# Altium PCB BLDC Motor Controller.PcbDoc
Units mm, origin at the board's own origin, x right, y up, seen from the top; angles counter-clockwise.
Board outline 100 x 80 mm, 4 copper layers (L1 - Primary, L2 - GND, L3 - GND, L4 - Secondary), stack 1.57 mm thick; 78 components, 40 nets, 216 pads, 255 vias.
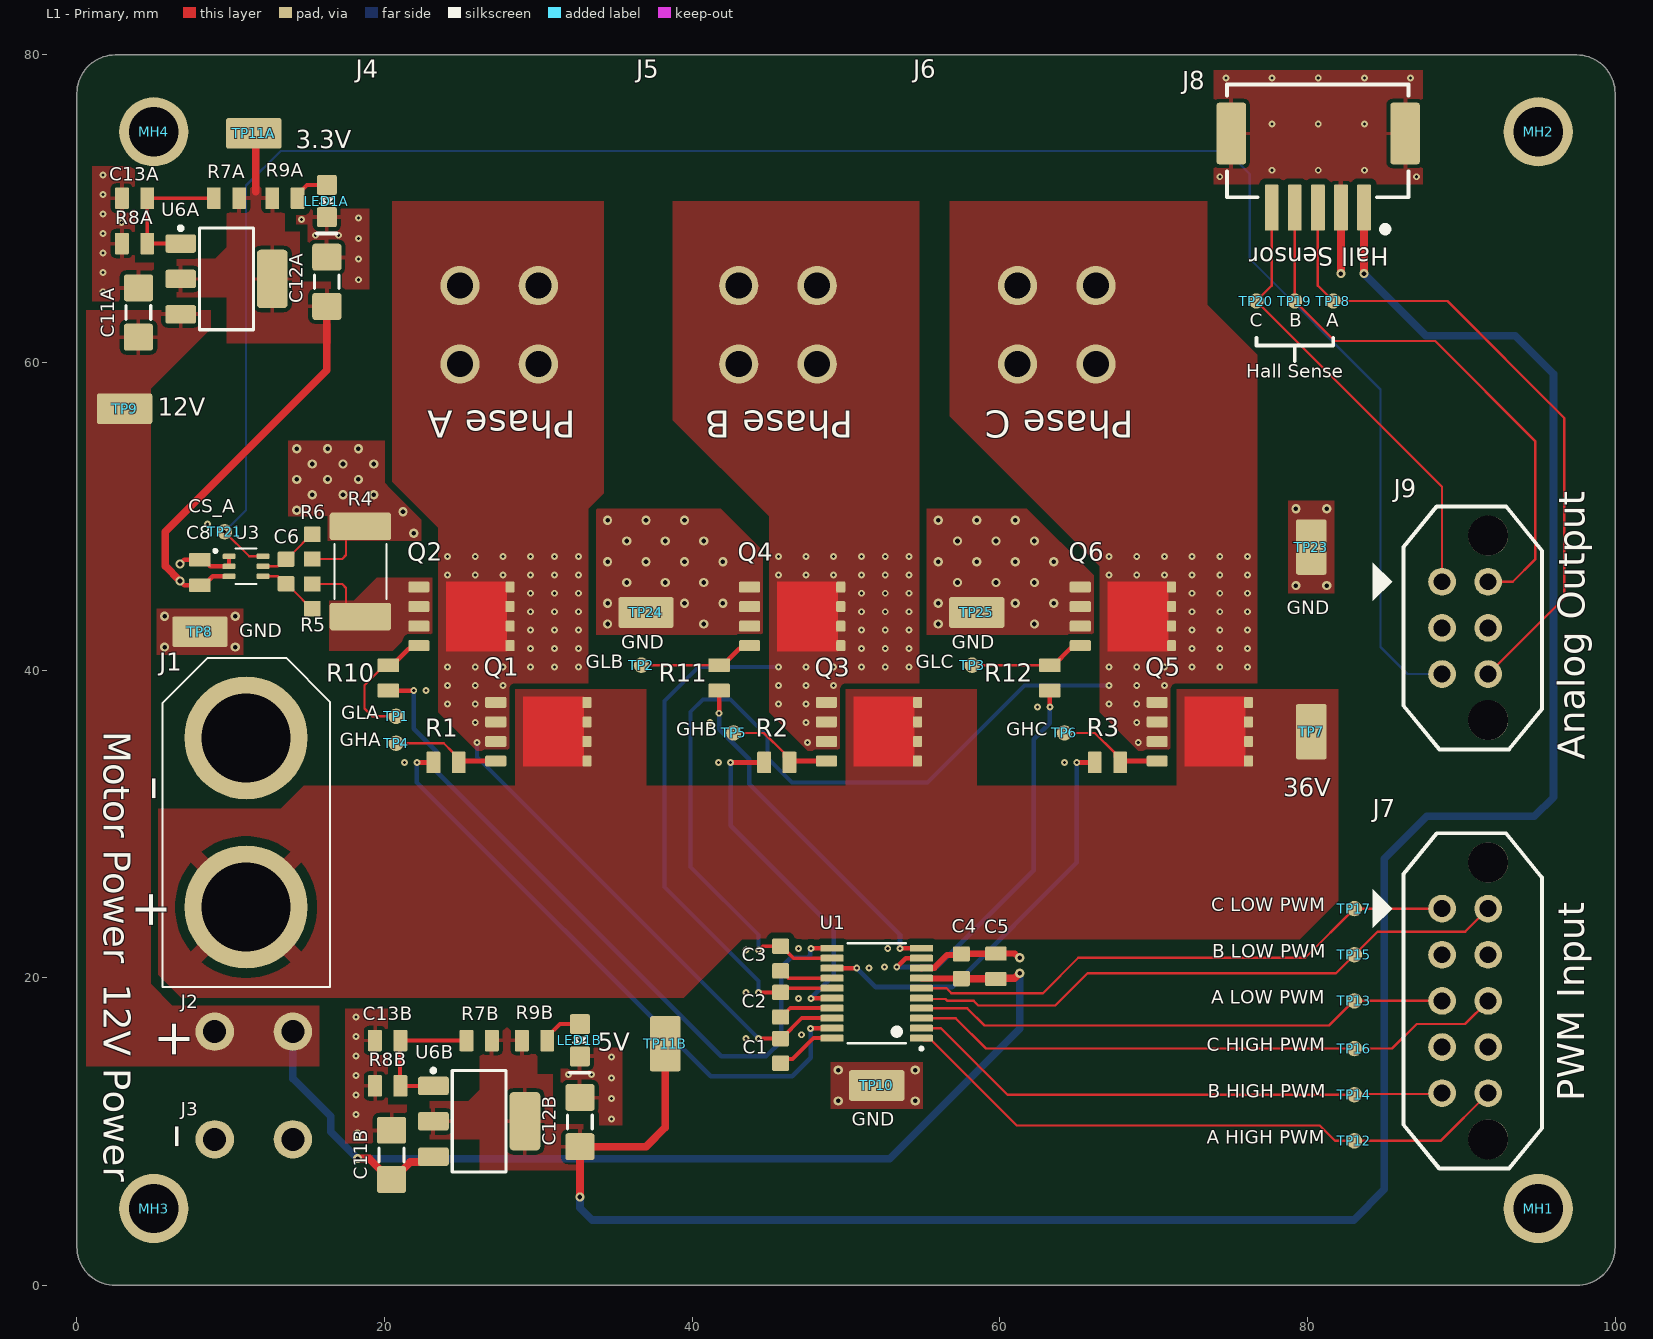
[diagram p0: L1 - Primary view]
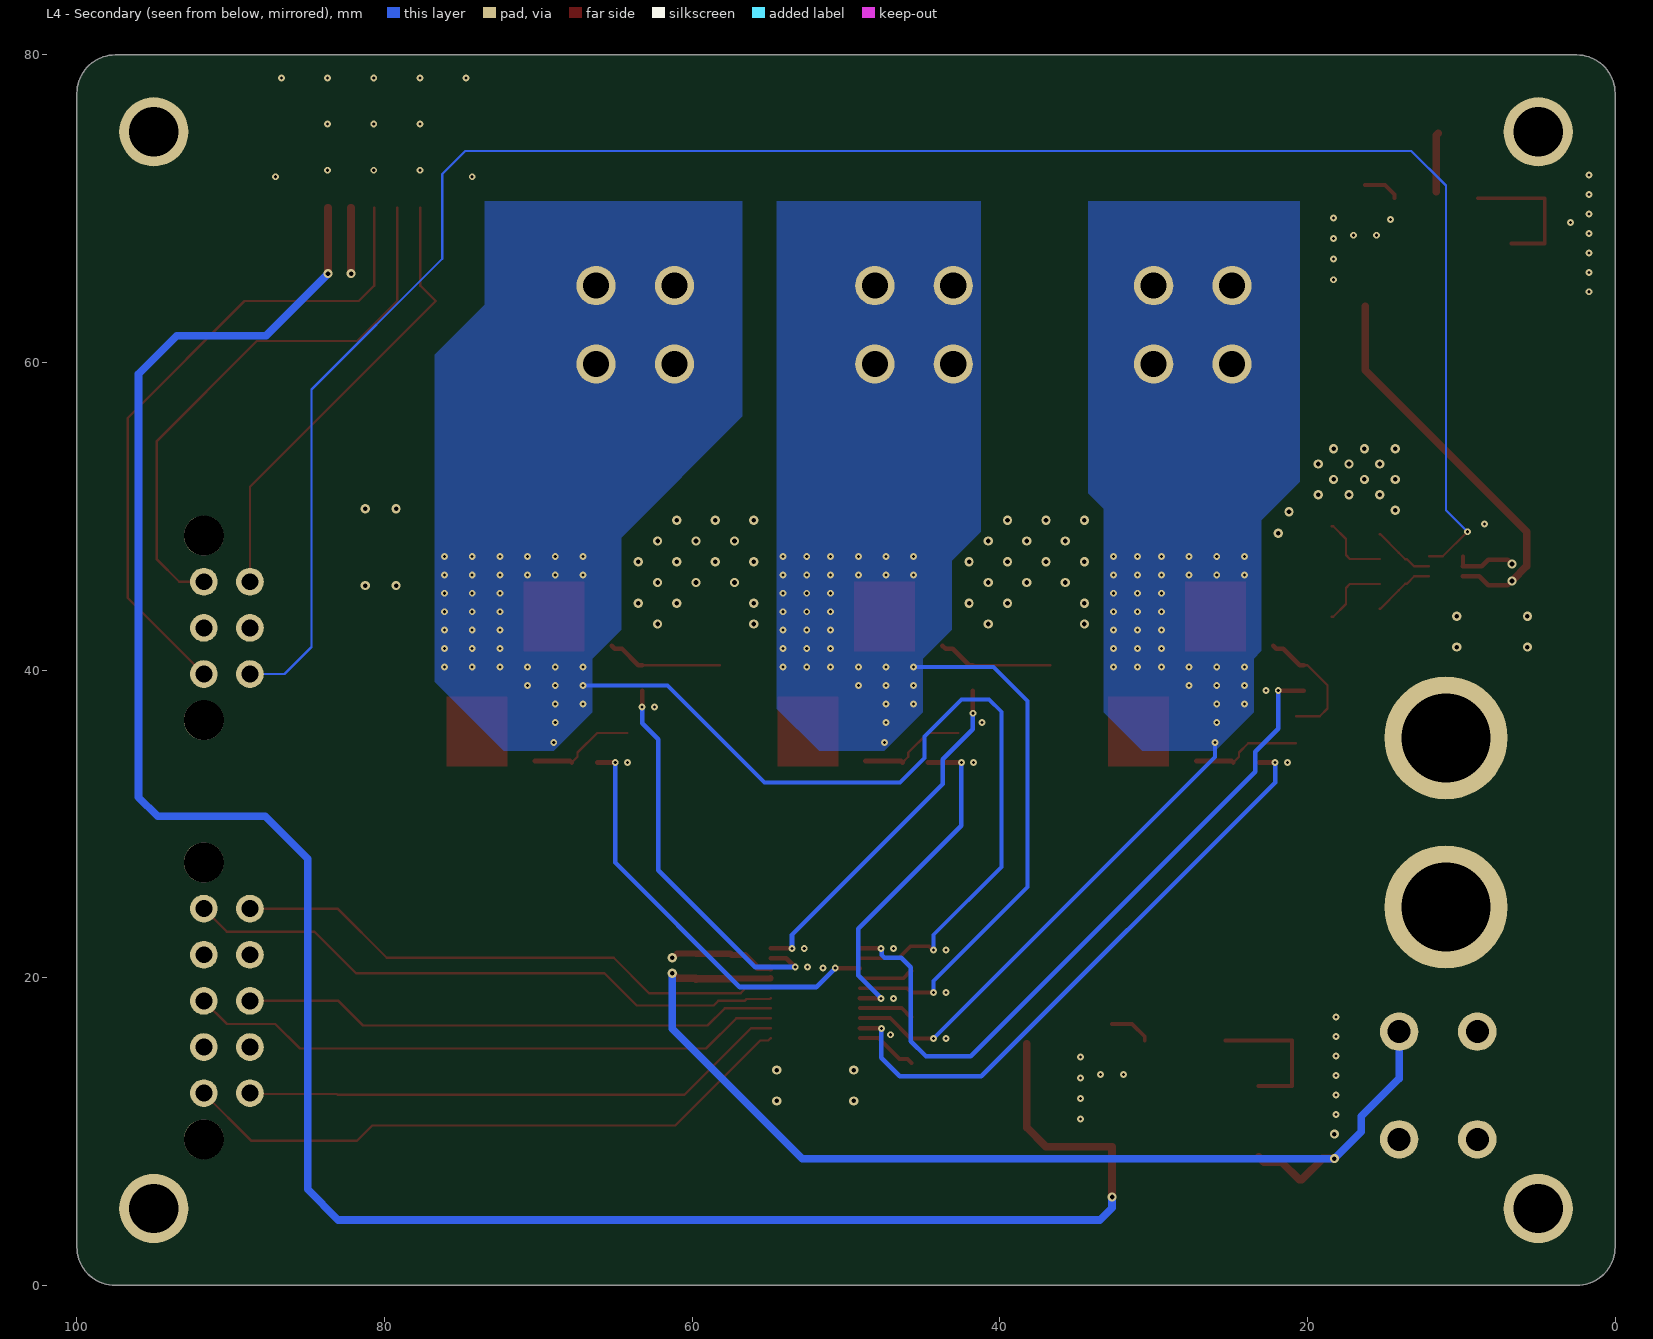
[diagram p1: L4 - Secondary view, seen from below]
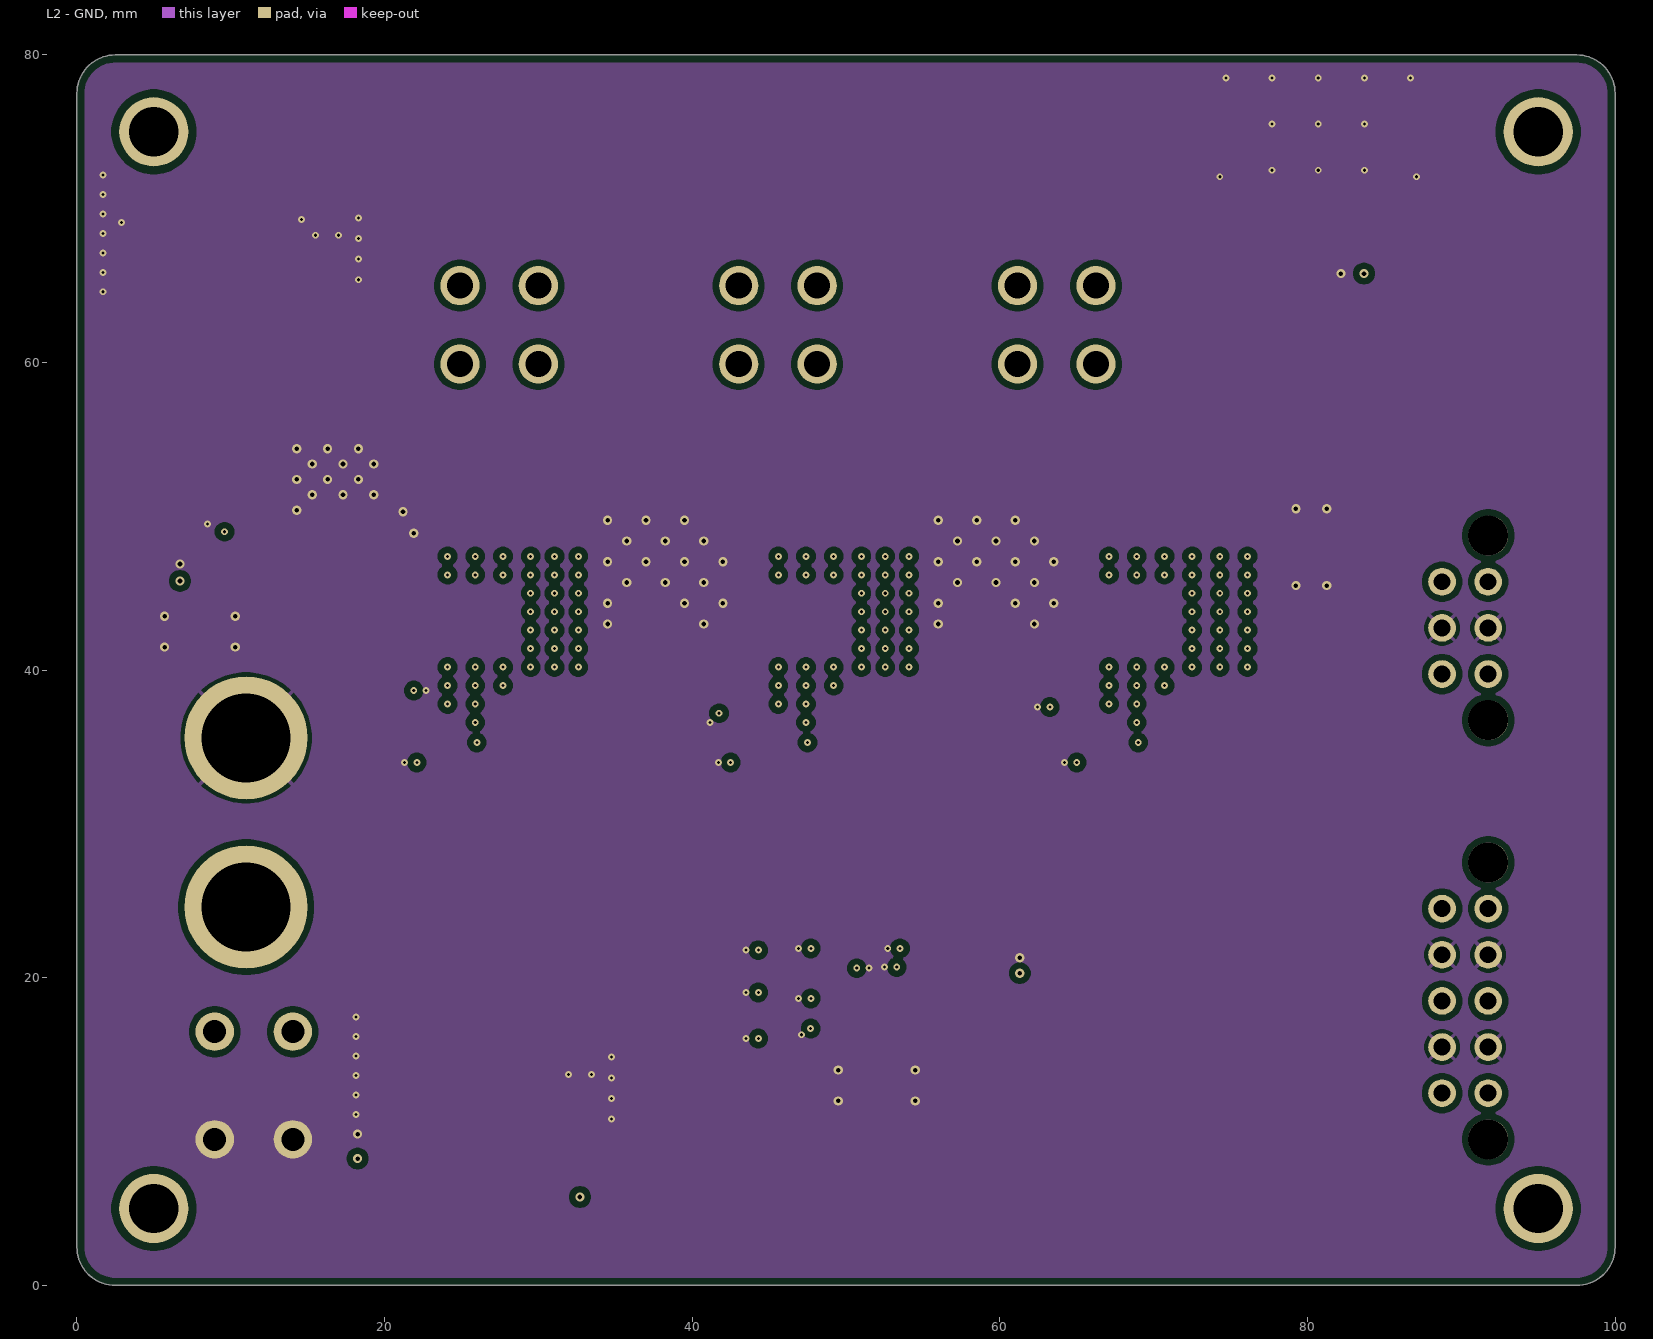
[diagram p2: L2 - GND]
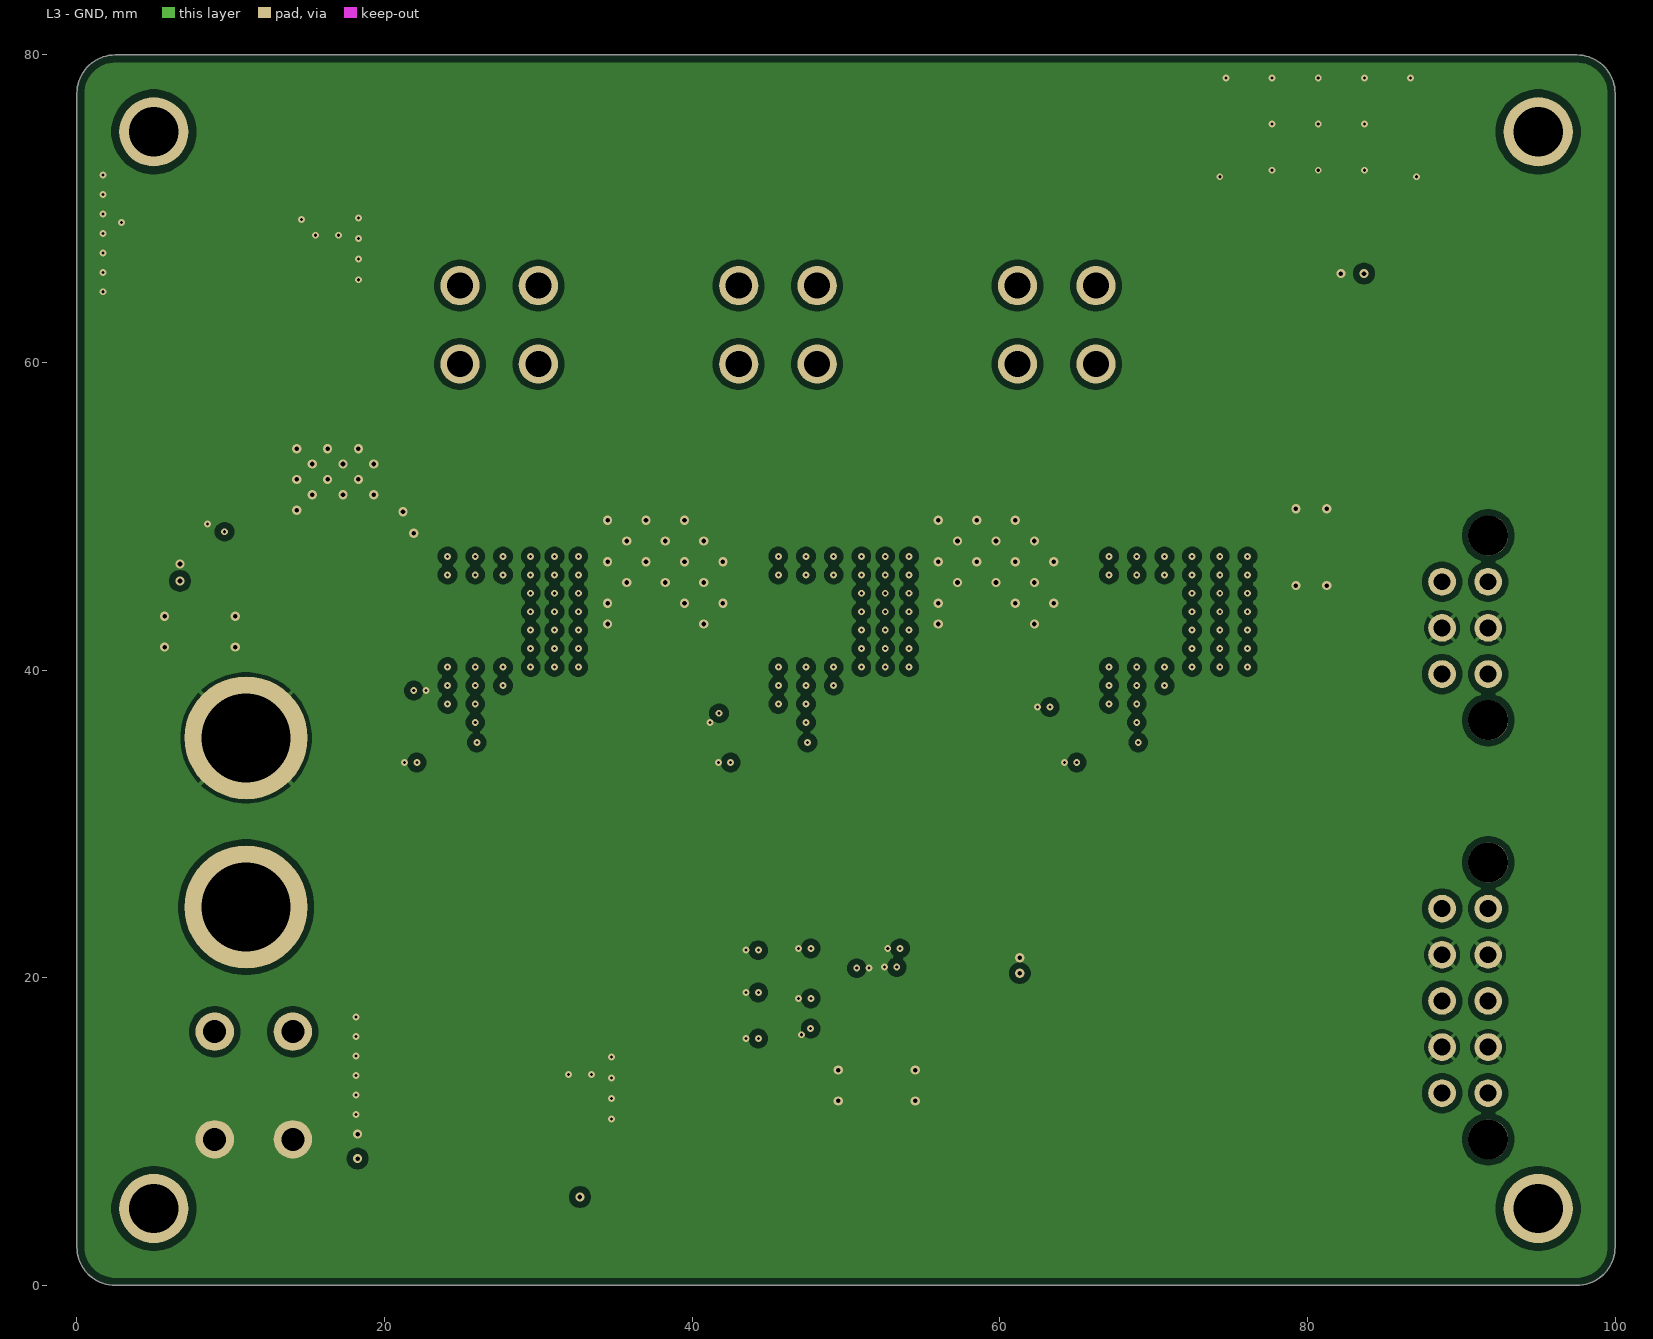
[diagram p3: L3 - GND]
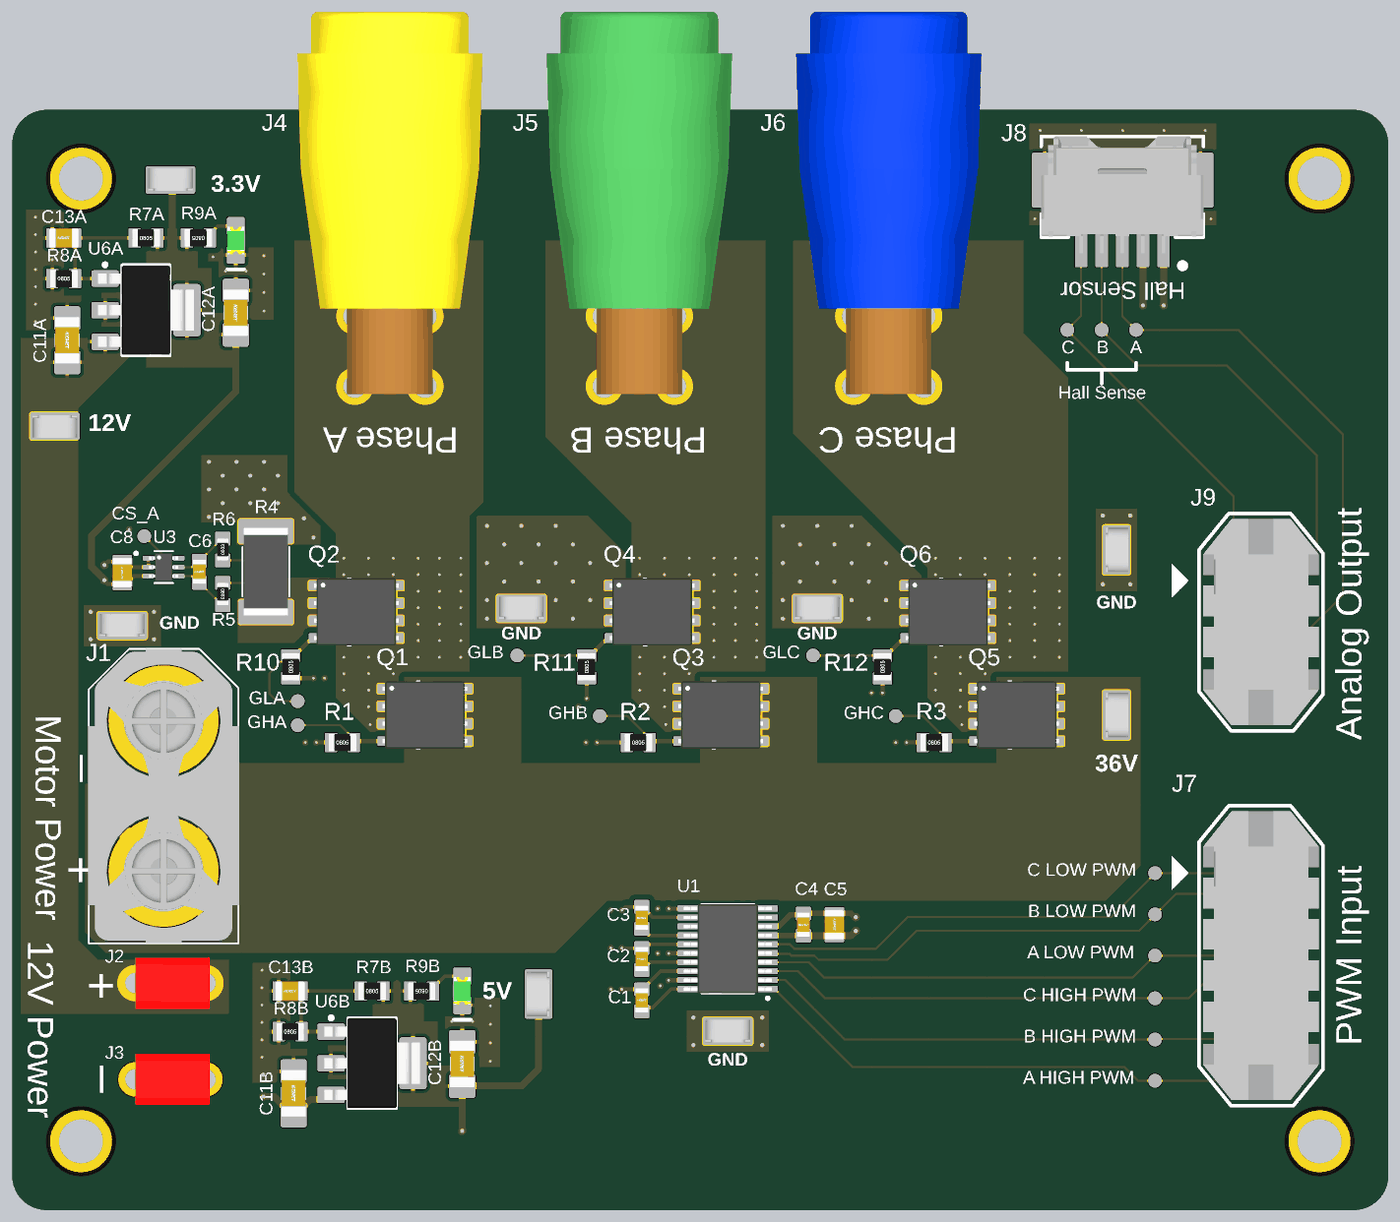
[diagram p4: 3D render of the assembled board from above, using the file's embedded part models]

## Layer stack, top to bottom
Top Solder: solder mask 0.0127, Solder Resist, Dk 3.8
L1 - Primary: signal copper 0.035
Dielectric 1: prepreg 0.2, 7628, Dk 4.6
L2 - GND: signal copper 0.0175
Core: core 1.065, FR-4, Dk 4.5
L3 - GND: signal copper 0.0175
Dielectric 2: prepreg 0.2, 7628, Dk 4.6
L4 - Secondary: signal copper 0.035
Bottom Solder: solder mask 0.0127, Solder Resist, Dk 3.8

## Board outline
0,2.5 ccw(c2.5,2.5) 2.5,0 97.5,0 ccw(c97.5,2.5) 100,2.5 100,77.5 ccw(c97.5,77.5) 97.5,80 2.5,80 ccw(c2.5,77.5) 0,77.5

## Design rules (kind name [scope] priority, off if disabled: settings)
BoardOutlineClearance [All] p1: gap=1 ignorepadtopadclearanceinfootprint=FALSE except(0.5: Fill-OutlineEdge Fill-CavityEdge Fill-CutoutEdge Fill-SplitBarrior Fill-SplitContinuation Poly-OutlineEdge Poly-CavityEdge Poly-CutoutEdge Poly-SplitBarrior Poly-SplitContinuation Region-OutlineEdge Region-CavityEdge Region-CutoutEdge Region-SplitBarrior Region-SplitContinuation Text-OutlineEdge Text-CavityEdge Text-CutoutEdge Text-SplitBarrior Text-SplitContinuation)
Clearance Clearance_MH [HasFootprint('MOUNTING_HOLE_3mm')] p1: gap=0.5 ignorepadtopadclearanceinfootprint=FALSE
Clearance [All] p2: gap=0.4 ignorepadtopadclearanceinfootprint=FALSE except(0.102: Arc-Arc Arc-Track Arc-SMDPad Arc-THPad Arc-Text Track-Track Track-SMDPad Track-THPad Track-Text SMDPad-SMDPad SMDPad-THPad SMDPad-Text THPad-THPad THPad-Text Text-Text; 0.127: Arc-Via Track-Via SMDPad-Via THPad-Via Via-Via Via-Text; 0.25: Arc-Hole Track-Hole SMDPad-Hole THPad-Hole Via-Hole Fill-Hole Poly-Hole Region-Hole Text-Hole)
ComponentClearance [All] p1: gap=0.102 collisioncheckmode=3 verticalgap=0.102 showdistances=TRUE
DiffPairsRouting [All] p1: maxlimit=0.102 minlimit=0.102 mostfreqgap=0.102 toplayer_minwidth=0.102 toplayer_maxwidth=1816.048 toplayer_prefwidth=0.102 midlayer1_minwidth=0.102 midlayer1_maxwidth=1816.048 midlayer1_prefwidth=0.102 midlayer2_minwidth=0.102 midlayer2_maxwidth=1816.048 midlayer2_prefwidth=0.102 bottomlayer_minwidth=0.102 bottomlayer_maxwidth=1816.048 bottomlayer_prefwidth=0.102 maxuncoupledlength=12.7
Height [All] p1: minheight=0 maxheight=1816.048 prefheight=12.7
HoleSize [All] p1: absolutevalues=TRUE maxlimit=6.3 minlimit=0.2 maxpercent=80.000 minpercent=20.000
HoleToHoleClearance [All] p1: gap=0.25 allowstackedmicrovias=FALSE
MinimumAnnularRing [All] p1: minimumring=0.076
MinimumSolderMaskSliver [All] p1: minsoldermaskwidth=0
PlaneClearance [All] p1: clearance=0.102
PlaneConnect PlaneConnectPowerPads [InPadClass('PowerPads')] p1: planeconnectstyle=Direct reliefexpansion=0.508 reliefentries=4 reliefconductorwidth=0.254 reliefairgap=0.254
PlaneConnect [All] p2: pad.planeconnectstyle=Relief pad.reliefexpansion=0.3 pad.reliefentries=4 pad.reliefconductorwidth=0.102 pad.reliefairgap=0.102 via.planeconnectstyle=Direct via.reliefexpansion=0.3 via.reliefentries=4 via.reliefconductorwidth=0.127 via.reliefairgap=0.127
PolygonConnect PolygonConnectPowerPads [All vs (InPadClass('PowerPads'))] p1: connectstyle=Direct reliefconductorwidth=0.254 reliefentries=4 polygonreliefangle="90 Angle" airgapwidth=0.254
PolygonConnect [All] p2: thpad.connectstyle=Relief thpad.reliefconductorwidth=0.254 thpad.reliefentries=4 thpad.polygonreliefangle="45 Angle" thpad.airgapwidth=0.254 smdpad.connectstyle=Relief smdpad.reliefconductorwidth=0.254 smdpad.reliefentries=4 smdpad.polygonreliefangle="90 Angle" smdpad.airgapwidth=0.254 via.connectstyle=Direct via.reliefconductorwidth=0.127 via.reliefentries=4 via.polygonreliefangle="90 Angle" via.airgapwidth=0.127
RoutingVias [All] p1: holewidth=0.2 width=0.45 viastyle="Through Hole" minholewidth=0.2 minwidth=0.45 maxholewidth=6.3 maxwidth=6.55
SilkToSilkClearance [All] p1: silktosilkclearance=0
SilkToSolderMaskClearance [IsPad] p1: minsilkscreentomaskgap=0.102 clearancetoexposedcopper=TRUE
SolderMaskExpansion SolderMaskExpansion_Via [IsVia] p1: expansion=0.102 istentingtop=TRUE
SolderMaskExpansion [All] p2: expansion=0.075 istentingtop=FALSE
Width [All] p1: maxlimit=1816.048 minlimit=0.102 preferedwidth=0.102
20 further rules are at their usual default settings.

## Classes and differential pairs
component class "Phase A CS": C6 C8 R4 R5 R6 TP21 U3
channel class NCV1117STAT3G: "3V3 Power" "5V Power"
component class Top: J1 J2 J3 J4 J5 J6 J7 J8 J9 MH1 MH2 MH3 MH4 TP7 TP8 TP9 TP10 TP12 TP13 TP14 TP15 TP16 TP17 TP18 TP19 TP20 TP23 TP24 TP25
component class Bridge: C1 C2 C3 C4 C5 Q1 Q2 Q3 Q4 Q5 Q6 R1 R2 R3 R10 R11 R12 TP1 TP2 TP3 TP4 TP5 TP6 U1
component class "5V Power": C11B C12B C13B LED1B R7B R8B R9B TP11B U6B
component class "3V3 Power": C11A C12A C13A LED1A R7A R8A R9A TP11A U6A v

## Components (designator, comment, footprint, x,y, rotation, side; value= is the part's Value field where it differs from the comment)
C1 "CAP_0.22uF_50V_0603" CAP0603 45.75,15.25 r270 top value=0.22μF
C2 "CAP_0.22uF_50V_0603" CAP0603 45.75,18.25 r270 top value=0.22μF
C3 "CAP_0.22uF_50V_0603" CAP0603 45.75,21.25 r270 top value=0.22μF
C4 "CAP_0.1uF_50V_0603" CAP0603 57.5,20.75 r270 top value=0.1μF
C5 "CAP_2.2uF_50V_0805" CAP0805 59.75,20.75 r270 top value=2.2μF
C6 "CAP_0.1uF_50V_0603" CAP0603 13.6,46.415 r270 top value=0.1μF
C8 "CAP_0.1uF_50V_0805" CAP0805 8,46.35 r90 top value=0.1μF
C11A "CAP_10uF_50V_1206" CAP1206 4,63.25 r270 top value=10μF (schematic designator C11)
C11B "CAP_10uF_50V_1206" CAP1206 20.452,8.489 r270 top value=10μF (schematic designator C11)
C12A "CAP_10uF_50V_1206" CAP1206 16.25,65.25 r270 top value=10μF (schematic designator C12)
C12B "CAP_10uF_50V_1206" CAP1206 32.702,10.622 r270 top value=10μF (schematic designator C12)
C13A "CAP_0.022uF_50V_0805" CAP0805 3.751,70.683 r0 top value=22nF (schematic designator C13)
C13B "CAP_0.022uF_50V_0805" CAP0805 20.202,15.922 r0 top value=22nF (schematic designator C13)
J1 "CON_2POS_XT90" XT90 11,30.1 r90 top
J2 "105-1102-001" CINCH_BANANA_JACK_RED 11.5,16.5 r0 top
J3 "105-1103-001" CINCH_BANANA_JACK_RED 11.5,9.5 r0 top
J4 "CT3151SP-4" CALTEST_BANANA_JACK_YELLOW 27.45,62.45 r90 top
J5 "CT3151SP-5" CALTEST_BANANA_JACK_GREEN 45.575,62.45 r90 top
J6 "CT3151SP-6" CALTEST_BANANA_JACK_BLUE 63.7,62.45 r90 top
J7 "0447691001" MOLEX-0447691001 90.25,18.5 r270 top
J8 "CON_5M_SM_RA" MOLEX-5025850570 83.675,70.07 r0 top
J9 "0447690601" MOLEX-0447690601 90.25,42.75 r270 top
LED1A "LED_GREEN" LED_0805_GREEN 16.25,70.5 r270 top (schematic designator LED1)
LED1B "LED_GREEN" LED_0805_GREEN 32.702,15.939 r270 top (schematic designator LED1)
MH1 "MOUNTING_HOLE_M3" MOUNTING_HOLE_3mm 95,5 r0 top
MH2 "MOUNTING_HOLE_M3" MOUNTING_HOLE_3mm 95,75 r0 top
MH3 "MOUNTING_HOLE_M3" MOUNTING_HOLE_3mm 5,5 r0 top
MH4 "MOUNTING_HOLE_M3" MOUNTING_HOLE_3mm 5,75 r0 top
Q1 "CSD19502Q5B" DFN5060 30,36 r270 top
Q2 "CSD19502Q5B" DFN5060 25,43.5 r270 top
Q3 "CSD19502Q5B" DFN5060 51.5,36 r270 top
Q4 "CSD19502Q5B" DFN5060 46.5,43.5 r270 top
Q5 "CSD19502Q5B" DFN5060 73,36 r270 top
Q6 "CSD19502Q5B" DFN5060 68,43.5 r270 top
R1 "RES_10Ω_0805_1%" RES0805 24,34 r0 top value=10Ω
R2 "RES_10Ω_0805_1%" RES0805 45.5,34 r0 top value=10Ω
R3 "RES_10Ω_0805_1%" RES0805 67,34 r0 top value=10Ω
R4 "RES_1mΩ_2512_1%" RESC6532X75N 18.435,46.415 r270 top value=1mΩ
R5 "RES_100Ω_0603_1%" RES0603 15.3,44.8 r270 top value=100Ω
R6 "RES_100Ω_0603_1%" RES0603 15.3,48.03 r90 top value=100Ω
R7A "RES_845Ω_0805_1%" RES0805 9.726,70.683 r0 top value=845Ω (schematic designator R7)
R7B "RES_845Ω_0805_1%" RES0805 26.152,15.922 r0 top value=845Ω (schematic designator R7)
R8A "RES_510Ω_0805_1%" RES0805 3.751,67.733 r0 top value=510Ω (schematic designator R8)
R8B "RES_510Ω_0805_1%" RES0805 20.202,12.972 r0 top value=510Ω (schematic designator R8)
R9A "RES_787Ω_0805_1%" RES0805 13.526,70.683 r180 top value=787Ω (schematic designator R9)
R9B "RES_787Ω_0805_1%" RES0805 29.752,15.922 r180 top value=787Ω (schematic designator R9)
R10 "RES_10Ω_0805_1%" RES0805 20.25,39.5 r90 top value=10Ω
R11 "RES_10Ω_0805_1%" RES0805 41.75,39.5 r90 top value=10Ω
R12 "RES_10Ω_0805_1%" RES0805 63.25,39.5 r90 top value=10Ω
TP1 "TESTPOINT_1MM_CIRCLE" TESTPOINT_CIRCLE_1MM 20.75,37 r90 top
TP2 "TESTPOINT_1MM_CIRCLE" TESTPOINT_CIRCLE_1MM 36.7,40.325 r90 top
TP3 "TESTPOINT_1MM_CIRCLE" TESTPOINT_CIRCLE_1MM 58.2,40.325 r90 top
TP4 "TESTPOINT_1MM_CIRCLE" TESTPOINT_CIRCLE_1MM 20.75,35.25 r90 top
TP5 "TESTPOINT_1MM_CIRCLE" TESTPOINT_CIRCLE_1MM 42.7,35.922 r90 top
TP6 "TESTPOINT_1MM_CIRCLE" TESTPOINT_CIRCLE_1MM 64.2,35.922 r90 top
TP7 "TESTPOINT_SMD_LOOP" S1751-46R 80.25,36 r90 top
TP8 "TESTPOINT_SMD_LOOP" S1751-46R 8,42.5 r180 top
TP9 "TESTPOINT_SMD_LOOP" S1751-46R 3.1,57 r0 top
TP10 "TESTPOINT_SMD_LOOP" S1751-46R 52,13 r180 top
TP11A "TESTPOINT_SMD_LOOP" S1751-46R 11.5,74.9 r180 top (schematic designator TP11)
TP11B "TESTPOINT_SMD_LOOP" S1751-46R 38.25,15.709 r270 top (schematic designator TP11)
TP12 "TESTPOINT_1MM_CIRCLE" TESTPOINT_CIRCLE_1MM 83.05,9.4 r90 top
TP13 "TESTPOINT_1MM_CIRCLE" TESTPOINT_CIRCLE_1MM 83.05,18.5 r90 top
TP14 "TESTPOINT_1MM_CIRCLE" TESTPOINT_CIRCLE_1MM 83.05,12.4 r90 top
TP15 "TESTPOINT_1MM_CIRCLE" TESTPOINT_CIRCLE_1MM 83.05,21.5 r90 top
TP16 "TESTPOINT_1MM_CIRCLE" TESTPOINT_CIRCLE_1MM 83.05,15.4 r90 top
TP17 "TESTPOINT_1MM_CIRCLE" TESTPOINT_CIRCLE_1MM 83.05,24.5 r90 top
TP18 "TESTPOINT_1MM_CIRCLE" TESTPOINT_CIRCLE_1MM 81.675,64 r90 top
TP19 "TESTPOINT_1MM_CIRCLE" TESTPOINT_CIRCLE_1MM 79.175,64 r90 top
TP20 "TESTPOINT_1MM_CIRCLE" TESTPOINT_CIRCLE_1MM 76.675,64 r90 top
TP21 "TESTPOINT_1MM_CIRCLE" TESTPOINT_CIRCLE_1MM 9.6,49 r0 top
TP23 "TESTPOINT_SMD_LOOP" S1751-46R 80.25,48 r90 top
TP24 "TESTPOINT_SMD_LOOP" S1751-46R 37,43.75 r180 top
TP25 "TESTPOINT_SMD_LOOP" S1751-46R 58.5,43.75 r180 top
U1 "DRV8300NIPWR" 20-TSSOP_4400X6500X1200 52,19 r180 top
U3 "INA190A2IDCKR" TI_SC-70-6 11,46.75 r0 top
U6A "LDO_ADJ_1A" SOT223 9.726,65.433 r0 top (schematic designator U6)
U6B "LDO_ADJ_1A" SOT223 26.152,10.672 r0 top (schematic designator U6)

## Footprints (in the part's own frame and the unit in brackets; to place one, negate y for a bottom-side part, rotate by r counter-clockwise, add the part's x,y. Pads: shape width x height; smd on the part's side, far side on the other; paste and mask are expansions set on the pad)
20-TSSOP_4400X6500X1200 [mm]
  rrect25% 1.5x0.45 smd mask+0.05: 1(-2.9,2.925) 2(-2.9,2.275) 3(-2.9,1.625) 4(-2.9,0.975) 5(-2.9,0.325) 6(-2.9,-0.325) 7(-2.9,-0.975) 8(-2.9,-1.625) 9(-2.9,-2.275) 10(-2.9,-2.925) 11(2.9,-2.925) 12(2.9,-2.275) 13(2.9,-1.625) 14(2.9,-0.975) 15(2.9,-0.325) 16(2.9,0.325) 17(2.9,0.975) 18(2.9,1.625) 19(2.9,2.275) 20(2.9,2.925)
  silkscreen extent -3,-3.25 1.9,3.7, body extent -3.2,-3.25 3.2,3.25, height 1.13
CALTEST_BANANA_JACK_BLUE [mm]
  round 2.55 hole 1.7: 1(-2.55,-2.55) 1(-2.55,2.55) 1(2.55,-2.55) 1(2.55,2.55)
  body extent -3.11,-6.73 24.69,6.73, height 14.35
CALTEST_BANANA_JACK_GREEN [mm]
  round 2.55 hole 1.7: 1(-2.55,-2.55) 1(-2.55,2.55) 1(2.55,-2.55) 1(2.55,2.55)
  body extent -3.11,-6.73 24.69,6.73, height 14.35
CALTEST_BANANA_JACK_YELLOW [mm]
  round 2.55 hole 1.7: 1(-2.55,-2.55) 1(-2.55,2.55) 1(2.55,-2.55) 1(2.55,2.55)
  body extent -3.11,-6.73 24.69,6.73, height 14.35
CAP0603 [mm]
  rrect20% 1x1.1 smd: 1(-0.8,0) 2(0.8,0)
  body extent -0.88,-0.48 0.88,0.47, height 0.87
CAP0805 [mm] "Chip Capacitor, Body 2.0x1.2mm, Height 0.45mm, IPC Medium Density"
  rrect15% 0.9x1.4 smd: 1(-0.825,0) 2(0.825,0)
  body extent -1.1,-0.73 1.1,0.72, height 1.39
CAP1206 [mm] "Chip Capacitor, Body 3.2x1.6mm, Height 0.55mm, IPC Medium Density"
  rrect20% 1.75x1.9 smd: 1(-1.6,0) 2(1.6,0)
  silkscreen extent -0.45,-0.8 0.45,0.8, body extent -1.7,-0.9 1.7,0.9, height 0.88
CINCH_BANANA_JACK_RED [mm]
  round 2.5 hole 1.5: 1(-2.54,0) 1(2.54,0)
  body extent -2.54,-1.87 2.84,1.87, height 5.16
DFN5060 [mm]
  rrect25% 0.71x1.372 smd: 1(-1.905,-2.77) 2(-0.635,-2.77) 3(0.635,-2.77) 4(1.905,-2.77)
  rrect25% 0.71x0.59 smd: 5(1.905,3.161) 6(0.635,3.161) 7(-0.635,3.161) 8(-1.905,3.161)
  L1 - Primary region: -2.26,-0.984 -2.26,2.95 2.26,2.95 2.26,-0.984
  body extent -2.5,-3.08 2.5,3.08, height 1.1
LED_0805_GREEN [mm] "SMD, 2-Leads, Body 2x1.25mm"
  rrect20% 1.3x1.3 smd: 1(-1.05,0) 2(1.05,0)
  silkscreen extent -0.18,-0.63 2.11,0.64, body extent -1,-0.62 1,0.63, height 1.12
MOLEX-0447690601 [mm]
  round 1.8 hole 1.1: 1(-3,-1.5) 2(0,-1.5) 3(3,-1.5) 4(-3,1.5) 5(0,1.5) 6(3,1.5)
  round 2.6 hole 2.6 unplated mask+0.05: MH1(-6,1.5) MH2(6,1.5)
  silkscreen extent -7.9,-6 7.9,5, body extent -7.5,-3.7 7.5,4.7, height 13.6
MOLEX-0447691001 [mm]
  round 1.8 hole 1.1: 1(-6,-1.5) 2(-3,-1.5) 3(0,-1.5) 4(3,-1.5) 5(6,-1.5) 6(-6,1.5) 7(-3,1.5) 8(0,1.5) 9(3,1.5) 10(6,1.5)
  round 2.6 hole 2.6 unplated mask+0.05: MH1(-9,1.5) MH2(9,1.5)
  silkscreen extent -10.9,-6 10.9,5, body extent -10.5,-3.7 10.5,4.7, height 13.6
MOLEX-5025850570 [mm]
  rrect15% 1.9x4 smd: 0(-8.625,4.82) 0(2.675,4.82)
  rrect15% 0.9x3 smd: 1(0,0) 2(-1.5,0) 3(-3,0) 4(-4.5,0) 5(-6,0)
  silkscreen extent -8.9,-1.6 2.9,8, body extent -8.9,-0.5 2.9,8, height 6.21
MOUNTING_HOLE_3mm [mm] "3mm Hole"
  round 4.5 hole 3.2 mask+0.3: 0(0,0)
RES0603 [mm] "Chip Resistor, Body 1.6x0.8mm, IPC Medium Density"
  rrect15% 1x1.1 smd: 1(-0.8,0) 2(0.8,0)
  body extent -0.8,-0.4 0.8,0.4, height 0.46
RES0805 [mm] "Chip Resistor, 2-Leads, Body 2.00x1.25mm, IPC High Density"
  rrect15% 0.9x1.4 smd: 1(-0.825,0) 2(0.825,0)
  body extent -1,-0.62 1,0.63, height 0.61
RESC6532X75N [mm]
  rrect20% 1.8x4 smd: 1(-2.935,0) 2(2.935,0)
  silkscreen extent -1.79,-1.7 1.79,1.7, body extent -3.17,-1.6 3.18,1.6, height 0.65
S1751-46R [mm] "SMD LOOP TESTPOINT"
  rrect15% 3.6x2 smd: 1(0,0)
  body extent -1.62,-0.85 1.63,0.8, height 2.01
SOT223 [mm] "SOT223, 4-Leads, Body 6.50x7.00mm (avg), Pitch 2.30mm, IPC Medium Density"
  rrect25% 2x1.2 smd: 1(-2.975,2.3) 2(-2.975,0) 3(-2.975,-2.3)
  rrect25% 2x3.8 smd: 4(2.975,0)
  silkscreen extent -3.1,-3.3 1.75,3.42, body extent -3.48,-3.25 3.48,3.25, height 1.65
TESTPOINT_CIRCLE_1MM [mm]
  round 1 smd: 1(0,0)
TI_SC-70-6 [mm]
  rrect50% 0.85x0.35 smd mask+0.05: 1(-1.1,0.65) 2(-1.1,0) 3(-1.1,-0.65) 4(1.1,-0.65) 5(1.1,0) 6(1.1,0.65)
  silkscreen extent -2.1,-1.16 0.68,1.16, body extent -1.05,-1 1.05,1, height 1.1
XT90 [mm]
  round 8 hole 5.8: 1(-5.5,0) 2(5.5,0)
  silkscreen extent -10.7,-5.45 10.7,5.42, body extent -10.7,-5.5 10.7,5.5, height 20.7

## Part data
C1 C2 C3: "CAP CER 0.22UF 50V X7R 0603", Dielectric=X7R, LCSC Part #=C5378, Manufacturer 1="Taiyo Yuden", Manufacturer Part Number 1=UMK107B7224KA-TR, Package=0603, Supplier Part Number 1=587-5958-1-ND, Voltage Rating=50V, Mounting Type=SMD, Supplier 1=Digi-Key
C4 C6: "CAP CER 0.1UF 50V X7R 0603", Dielectric=X7R, Manufacturer 1=Yageo, Manufacturer Part Number 1=CC0603KRX7R9BB104, Package/Footprint=0603, Supplier Part Number 1=311-1344-1-ND, Voltage Rating=50V, Mounting Type=SMD, Supplier 1=Digi-Key
C5: "CAP CER 2.2UF 50V X5R 0805", Manufacturer 1="Samsung Electro-Mechanics", Manufacturer Part Number 1=CL21A225KBFNNNE, Package=0805, Supplier Part Number 1=1276-6702-1-ND, Voltage Rating=50V, Mounting Type=SMD, Supplier 1=Digi-Key
C8: "CAP CER 0.1UF 50V X7R 0805", Dielectric=X7R, LCSC Part #=C49678, Manufacturer 1="Murata Electronics", Manufacturer Part Number 1=GCM21BR71H104KA37K, Package/Footprint=0805, Supplier Part Number 1=490-8049-1-ND, Voltage Rating=50V, Mounting Type=SMD, Supplier 1=Digi-Key
C11A C11B C12A C12B: "CAP CER 10UF 50V X5R 1206", Dielectric=X5R, Manufacturer 1=Murata, Manufacturer Part Number 1=GRT31CR61H106KE01L, Package=1206, Supplier Part Number 1=490-12456-1-ND, Voltage Rating=50V, Mounting Type=SMD, Supplier 1=Digi-Key
C13A C13B: "CAP CER 0.022UF 50V C0G 0805", Dielectric=C0G, LCSC Part #=C1729, Manufacturer 1="TDK Corporation", Manufacturer Part Number 1=CGA4J2C0G1H223J125AA, Package/Footprint=2012, Supplier Part Number 1=445-6949-1-ND, Voltage Rating=50V, Mounting Type=SMD, Supplier 1=Digi-Key
J1: "XT60 CONNECTORS MALE/FEMALE PAIR", Manufacturer 1=DFRobot, Manufacturer Part Number 1=FIT0588, Package/Footprint=XT90, Supplier Part Number 1=1738-1438-ND, Mounting Type=TH, Supplier 1=Digi-Key
J2: library part CON_BANANA_RED_5A, "CONN TIP JACK SOLDER RED", Current Rating=5A, Manufacturer 1="Cinch Connectivity Solutions Johnson", Supplier Part Number 1=J576-ND, Manufacturer Part Number 1=105-1102-001, Supplier 1=Digi-Key
J3: library part CON_BANANA_BLACK_5A, "CONN TIP JACK SOLDER BLACK", Current Rating=5A, Manufacturer 1="Cinch Connectivity Solutions Johnson", Supplier Part Number 1=J577-ND, Manufacturer Part Number 1=105-1103-001, Supplier 1=Digi-Key
J4: library part CON_BANANA_YELLOW_25A, "CONN BANANA JACK SOLDER YELLOW", Current Rating=25A, Manufacturer 1="Cal Test Electronics", Supplier Part Number 1=BKCT3151SP-4-ND, Manufacturer Part Number 1=CT3151SP-4, Supplier 1=Digi-Key
J5: library part CON_BANANA_GREEN_25A, "CONN BANANA JACK SOLDER GREEN", Current Rating=25A, Manufacturer 1="Cal Test Electronics", Supplier Part Number 1=BKCT3151SP-5-ND, Manufacturer Part Number 1=CT3151SP-5, Supplier 1=Digi-Key
J6: library part CON_BANANA_BLUE_25A, "CONN BANANA JACK SOLDER BLUE", Current Rating=25A, Manufacturer 1="Cal Test Electronics", Supplier Part Number 1=BKCT3151SP-6-ND, Manufacturer Part Number 1=CT3151SP-6, Supplier 1=Digi-Key
J7: library part CON_MOLEX-RCPT_5x2_TH, "CONN RCPT 10POS 0.118 TIN PCB", Current Rating=5A, Manufacturer 1=Molex, Supplier Part Number 1=WM1956-ND, Voltage Rating=250VAC, Family="Micro-Fit 3.0", Manufacturer Part Number 1=0447691001, Pitch=3mm, Supplier 1=Digi-Key
J8: "CONN HEADER SMD RIGHT ANGLE 1.5MM PITCH", Current Rating=2A, Manufacturer 1=Molex, Manufacturer Part Number 1=5025850570, Package/Footprint=SMD, Supplier Part Number 1=WM14469CT-ND, Family=CLIK-Mate, Mounting Type=SMD, Orientation="Right Angle", Supplier 1=Digi-Key
J9: library part CON_MOLEX-RCPT_3x2_TH, "CONN RCPT 6POS 0.118 TIN PCB", Current Rating=5A, Manufacturer 1=Molex, Supplier Part Number 1=23-0447690601-ND, Voltage Rating=250VAC, Family="Micro-Fit 3.0", Manufacturer Part Number 1=0447690601, Pitch=3mm, Supplier 1=Digi-Key
LED1A LED1B: "LED GREEN DIFFUSED 0805 SMD", Forward Voltage Drop=2.2V, Manufacturer 1=OSRAM, Manufacturer Part Number 1="LG R971-KN-1", Package/Footprint=0805, Supplier Part Number 1=475-1410-1-ND, Mounting Type=SMD, Supplier 1=Digi-Key
Q1 Q2 Q3 Q4 Q5 Q6: library part NMOS_CSD19502Q5B_80V_100A, "MOSFET N-CH 80V 100A 8VSON", Manufacturer 1="Texas Instruments", Package/Footprint=8-PowerTDFN, Supplier Part Number 1=296-37194-1-ND, Id=100A, Manufacturer Part Number 1=CSD19502Q5B, Supplier 1=Digi-Key, Vdss (Max)=80V, Vgs (Max)=±20V
R1 R2 R3 R10 R11 R12: "RES 10 OHM 1% 1/8W 0805", LCSC Part #=C17415, Manufacturer 1=Yageo, Manufacturer Part Number 1=RC0805FR-0710RL, Package=0805, Supplier Part Number 1=311-10.0CRCT-ND, Mounting Type=SMD, Supplier 1=Digi-Key
R4: "RES 1 mOHM 1% 3W 2512", Manufacturer 1=Riedon, Manufacturer Part Number 1=CSRL3-0R001F8, Package=2512, Supplier Part Number 1=696-1834-1-ND, Mounting Type=SMD, Supplier 1=Digi-Key
R5 R6: "RES 100 OHM 1% 1/10W 0603", Manufacturer 1=Yageo, Manufacturer Part Number 1=RC0603FR-07100RL, Supplier Part Number 1=311-100HRCT-ND, Supplier 1=Digi-Key
R7A R7B: "RES 845 OHM 1% 1/8W 0805", Manufacturer 1=YAGEO, Manufacturer Part Number 1=RC0805FR-07845RL, Package=0805, Power="0.125W, 1/8W", Supplier Part Number 1=311-845CRCT-ND, Tolerance=1%, Mounting Type=SMD, Supplier 1=Digi-Key
R8A R8B: "RES 510 OHM 1% 1/8W 0805", Manufacturer 1=Yageo, Manufacturer Part Number 1=RC0805FR-07510RL, Supplier Part Number 1=311-510CRCT-ND, Supplier 1=Digi-Key
R9A R9B: "RES 787 OHM 1% 1/8W 0805", Manufacturer 1=Yageo, Manufacturer Part Number 1=RC0805FR-07787RL, Package/Footprint=0805, Supplier Part Number 1=RHM.005APCT-ND, Mounting Type=SMD, Supplier 1=Digi-Key
TP1 TP2 TP3 TP4 TP5 TP6 TP12 TP13 TP14 TP15 TP16 TP17 TP18 TP19 TP20 TP21: "TESTPOINT 1MM CIRCLE"
TP7 TP8 TP9 TP10 TP11A TP11B TP23 TP24 TP25: "TESTPOINT SMD LOOP", Manufacturer 1=Harwin, Manufacturer Part Number 1=S1751-46R, Package/Footprint=SMD, Supplier Part Number 1=952-1478-1-ND, Mounting Type=SMD, Supplier 1=Digi-Key
U1: "100-V MAX SIMPLE 3-PHASE GATE DR", Manufacturer 1="Texas Instruments", Package/Footprint=20-TSSOP, Supplier Part Number 1=296-DRV8300NIPWRCT-ND, Manufacturer Part Number 1=DRV8300NIPWR, Supplier 1=Digi-Key
U3: "IC CURR SENSE 1 CIRCUIT SC70-6", Manufacturer 1="Texas Instruments", Package/Footprint=6-TSSOP, Supplier Part Number 1=296-INA190A2IDCKRCT-ND, Manufacturer Part Number 1=INA190A2IDCKR, Supplier 1=Digi-Key
U6A U6B: "IC REG LINEAR POS ADJ 1A SOT223", Input Voltage (Max)=20V, Manufacturer 1=onsemi, Manufacturer Part Number 1=NCV1117STAT3G, Operating Temperature="-40°C - 85°C", Output Current=1A, Output Voltage (Min)=1.25V, Package/Footprint=SOT-223, Supplier Part Number 1=NCV1117STAT3GOSCT-ND, Voltage Dropout (Max)=1.2V, Mounting Type=SMD, Supplier 1=Digi-Key

## Via types
v1: diameter 0.45, hole 0.2, L1 - Primary to L4 - Secondary, tented both sides, 183 vias
v2: diameter 0.6, hole 0.3, L1 - Primary to L4 - Secondary, tented both sides, 72 vias

## Nets (pads, with @x,y where several pads share a name; then routed paths per layer and width w, separated by ;. In a path a pad name is that pad's centre, name@x,y a point inside that pad or via, vN(x,y) a via of type N, cw(c..) or ccw(c..) an arc to the next point about the centre after c; other vN are vias at no path point)
3V3: C8.1 C12A.2 R7A.2 R9A.2 TP11A.1 U3.3 U6A.2 U6A.4 | length 30
  L1 - Primary w0.3: v2(6.7,45.8) 6.975,45.525 C8.1 8.25,45.525 8.825,46.1 U3.3
  L1 - Primary w0.5: v2(6.7,45.8) 6.7,45.827 5.75,46.777 5.75,49 16.25,59.5 C12A.2 ; TP11A.1 11.625,74.775 11.625,71.1
5V: C12B.2 J8.1 R7B.2 R9B.2 TP11B.1 U6B.2 U6B.4 | length 149.9
  L1 - Primary w0.5: v2(32.702,5.75) C12B.2 37,9.022 38.25,10.272 TP11B.1 ; v2(83.675,65.783) J8.1
  L4 - Secondary w0.5: v2(32.702,5.75) 32.702,5.048 33.5,4.25 83,4.25 85,6.25 85,27.75 87.75,30.5 94.75,30.5 96,31.75 96,59.25 93.5,61.75 87.708,61.75 v2(83.675,65.783)
12V: C4.2 C5.2 C11A.2 C11B.2 J2.1 TP9.1 U1.7 U6A.3 U6B.3 | length 72.8
  L1 - Primary w0.4: U1.7 54.912,19.962 57.487,19.962 C4.2 C4.2@57.513,19.937
  L1 - Primary w0.5: v2(18.25,8.25) 19.017,8.25 20.377,6.889 C11B.2 20.527,6.889 21.66,8.022 22.827,8.022 U6B.3 ; C4.2@57.513,19.937 59.738,19.937 C5.2 59.788,19.962 60.961,19.962 61.298,20.3 v2(61.3,20.3)
  L4 - Secondary w0.5: J2.1@14.04,16.5 14.04,13.46 16.5,11 16.5,10 v2(18.25,8.25) ; v2@18.252,8.248 52.848,8.248 61.3,16.7 v2(61.3,20.3)
36V: J1.1 Q1.5 Q1.6 Q1.7 Q1.8 Q3.5 Q3.6 Q3.7 Q3.8 Q5.5 Q5.6 Q5.7 Q5.8 TP7.1
ADJA: C13A.2 R7A.1 R8A.2 U6A.1 | length 9.5
  L1 - Primary w0.254: U6A.1 R8A.2 C13A.2 R7A.1
ADJB: C13B.2 R7B.1 R8B.2 U6B.1 | length 9.5
  L1 - Primary w0.254: U6B.1 21.002,12.972 21.002,15.922 R7B.1
BSTA: C1.2 U1.20 | length 4
  L1 - Primary w0.254: C1.2 46.011,14.711 46.511,14.711 47.875,16.075 U1.20
BSTB: C2.2 U1.17 | length 3.6
  L1 - Primary w0.254: C2.2 45.8,17.45 46.375,18.025 U1.17
BSTC: C3.2 U1.14 | length 3.5
  L1 - Primary w0.254: C3.2 45.8,20.45 46.275,19.975 U1.14
CS_A: J9.3 TP21.1 U3.6 | length 132
  L1 - Primary w0.15: v1(9.6,49) 11.2,47.4 U3.6
  L4 - Secondary w0.15: v1(9.6,49) 11,50.4 11,71.5 13.25,73.75 74.75,73.75 76.25,72.25 76.25,66.75 84.75,58.25 84.75,41.5 86.5,39.75 J9.3
GHA: Q1.4 R1.2 TP4.1 | length 7.2
  L1 - Primary w0.15: TP4.1 23.85,35.25 24.45,34.65 24.45,34.375 R1.2
  L1 - Primary w0.3: R1.2 24.92,34.095 Q1.4
GHB: Q3.4 R2.2 TP5.1 | length 7
  L1 - Primary w0.15: TP5.1 44.678,35.922 45.95,34.65 45.95,34.375 R2.2
  L1 - Primary w0.3: R2.2 46.42,34.095 Q3.4
GHC: Q5.4 R3.2 TP6.1 | length 7
  L1 - Primary w0.15: TP6.1 66.178,35.922 67.45,34.65 67.45,34.375 R3.2
  L1 - Primary w0.3: R3.2 67.92,34.095 Q5.4
GLA: Q2.4 R10.2 TP1.1 | length 8.4
  L1 - Primary w0.15: R10.2 20,40.325 18.7,39.025 18.7,37.5 19.2,37 TP1.1
  L1 - Primary w0.3: R10.2 20.5,40.325 21.565,41.39 22.025,41.39 Q2.4
GLB: Q4.4 R11.2 TP2.1 | length 7.6
  L1 - Primary w0.15: TP2.1 R11.2
  L1 - Primary w0.3: R11.2 42,40.325 43.065,41.39 43.525,41.39 Q4.4
GLC: Q6.4 R12.2 TP3.1 | length 7.6
  L1 - Primary w0.15: TP3.1 R12.2
  L1 - Primary w0.3: R12.2 63.5,40.325 64.565,41.39 65.025,41.39 Q6.4
GND: C4.1 C5.1 C8.2 C11A.1 C11B.1 C12A.1 C12B.1 C13A.1 C13B.1 J1.2 J3.1 J7.2 J7.4 J7.7 J7.9 J8.0 J8.2 J9.2 J9.5 LED1A.2 LED1B.2 Q4.1 Q4.2 Q4.3 Q6.1 Q6.2 Q6.3 R4.1 R6.1 R8A.1 R8B.1 TP8.1 TP10.1 TP23.1 TP24.1 TP25.1 U1.8 U3.1 U3.2 | length 20
  L1 - Primary w0.15: R6.1 17.25,47.23 17.5,47.48 17.5,48.533 18.317,49.35 R4.1
  L1 - Primary w0.254: U3.2 U3.1
  L1 - Primary w0.3: v2(6.7,46.9) 6.975,47.175 8.25,47.175 8.675,46.75 U3.2
  L1 - Primary w0.4: U1.8 54.925,20.65 55.75,20.65 56.584,21.484 57.434,21.484 57.513,21.562 59.738,21.562 C5.1 60.973,21.575 61.248,21.3 v2(61.3,21.3)
  L1 - Primary w0.5: v2(82.175,65.783) J8.2
  other v1: 34.752,10.819 18.152,11.106 34.752,12.159 18.152,12.373 34.752,13.499 18.152,13.639 31.952,13.714 33.452,13.714 34.752,14.839 18.152,14.906 43.5,16.05 18.152,16.173 47.1,16.3 18.152,17.439 46.912,18.662 43.5,19.05 51.5,20.625 52.512,20.7 43.5,21.8 46.912,21.912 52.712,21.912 21.3,34 41.7,34 64.2,34 41.15,36.6 62.45,37.6 22.7,38.675 8.5,49.5 1.7,64.6 18.3,65.38 1.7,65.867 18.3,66.72 1.7,67.133 18.3,68.06 15.5,68.275 17,68.275 1.7,68.4 2.9,69.1 14.6,69.3 18.3,69.4 1.7,69.667 1.7,70.933 74.3,72.079 87.1,72.079 1.7,72.2 77.7,72.5 80.7,72.5 83.7,72.5 77.7,75.5 80.7,75.5 83.7,75.5 74.7,78.5 77.7,78.5 80.7,78.5 83.7,78.5 86.7,78.5
  other v2: 18.25,9.839 49.5,12 54.5,12 49.5,14 54.5,14 5.7,41.5 10.3,41.5 34.5,43 40.75,43 56,43 62.25,43 5.7,43.5 10.3,43.5 34.5,44.35 39.5,44.35 42,44.35 56,44.35 61,44.35 63.5,44.35 79.25,45.5 81.25,45.5 35.75,45.7 38.25,45.7 40.75,45.7 57.25,45.7 59.75,45.7 62.25,45.7 34.5,47.05 37,47.05 39.5,47.05 42,47.05 56,47.05 58.5,47.05 61,47.05 63.5,47.05 35.75,48.4 38.25,48.4 40.75,48.4 57.25,48.4 59.75,48.4 62.25,48.4 21.9,48.9 34.5,49.75 37,49.75 39.5,49.75 56,49.75 58.5,49.75 61,49.75 21.2,50.3 14.3,50.4 79.25,50.5 81.25,50.5 15.3,51.4 17.3,51.4 19.3,51.4 14.3,52.4 16.3,52.4 18.3,52.4 15.3,53.4 17.3,53.4 19.3,53.4 14.3,54.4 16.3,54.4 18.3,54.4
HALL_A: J8.3 J9.6 TP18.1 | length 43.4
  L1 - Primary w0.15: J8.3 80.675,65 TP18.1 89.1,64 96.7,56.4 96.7,44.7 J9.6
HALL_B: J8.4 J9.4 TP19.1 | length 36.8
  L1 - Primary w0.15: J8.4 TP19.1 81.775,61.4 88.3,61.4 94.8,54.9 94.8,47.2 93.35,45.75 J9.4
HALL_C: J8.5 J9.1 TP20.1 | length 29.7
  L1 - Primary w0.15: J8.5 77.675,65 TP20.1 88.75,51.925 J9.1
NetC6_1: C6.1 R6.2 U3.5 | length 4.1
  L1 - Primary w0.15: U3.5 13.071,46.75 13.536,47.215 C6.1 13.636,47.215 14.06,47.638 14.06,47.64 15.25,48.83 R6.2
NetC6_2: C6.2 R5.2 U3.4 | length 4.1
  L1 - Primary w0.15: U3.4 13.051,46.1 13.536,45.615 13.636,45.615 14.06,45.192 14.06,45.19 15.25,44 R5.2
NetLED1A_1: LED1A.1 R9A.1 | length 2.4
  L1 - Primary w0.254: R9A.1 14.351,70.933 14.968,71.55 LED1A.1
NetLED1B_1: LED1B.1 R9B.1 | length 2.7
  L1 - Primary w0.254: R9B.1 30.577,16.172 31.394,16.989 LED1B.1
NetQ2_1: Q2.1 Q2.2 Q2.3 R4.2 R5.1 | length 4.6
  L1 - Primary w0.15: R5.1 17.25,45.6 17.5,45.35 17.5,44.297 18.317,43.48 R4.2
NetR1_1: R1.1 U1.19 | length 39.7
  L1 - Primary w0.254: v1(47.7,16.7) v1@47.713,16.712 ; U1.19@49.088,16.712 U1.19
  L1 - Primary w0.3: v1(22.1,34) R1.1 ; v1@47.713,16.712 U1.19@49.088,16.712
  L4 - Secondary w0.3: v1(22.1,34) 22.1,32.7 41.2,13.6 46.5,13.6 47.7,14.8 v1(47.7,16.7)
NetR2_1: R2.1 U1.16 | length 22.3
  L1 - Primary w0.3: v1(42.5,34) R2.1 ; v1@47.725,18.675 U1.16
  L4 - Secondary w0.3: v1(42.5,34) 42.5,29.891 49.205,23.186 49.205,20.155 v1(47.712,18.662)
NetR3_1: R3.1 U1.13 | length 27.5
  L1 - Primary w0.254: U1.13@49.088,20.612 U1.13
  L1 - Primary w0.3: U1.13 v1(50.7,20.625) ; v1(65,34) R3.1
  L4 - Secondary w0.3: v1(50.7,20.625) 51.925,19.4 56.9,19.4 65,27.5 v1(65,34)
NetR10_1: R10.1 U1.11 | length 46.8
  L1 - Primary w0.3: R10.1 v1(21.9,38.675) ; v1@47.725,21.925 U1.11
  L4 - Secondary w0.3: v1(21.9,38.675) 21.9,36.2 23.4,34.7 23.4,33.4 41.9,14.9 44.8,14.9 45.787,15.887 45.787,20.687 46.4,21.3 47.5,21.3 47.684,21.484 47.684,21.884 v1(47.712,21.912)
NetR11_1: R11.1 U1.10 | length 23
  L1 - Primary w0.3: v1(41.75,37.2) R11.1 ; v1@53.525,21.925 U1.10
  L4 - Secondary w0.3: v1(41.75,37.2) 41.75,36.15 43.7,34.2 43.7,32.6 53.512,22.788 v1(53.512,21.912)
NetR12_1: R12.1 U1.9 | length 25.5
  L1 - Primary w0.3: v1(53.3,20.7) 53.875,21.275 U1.9 ; v1(63.25,37.6) R12.1
  L4 - Secondary w0.3: v1(53.3,20.7) 55.9,20.7 62.2,27 62.2,35.5 63.25,36.55 v1(63.25,37.6)
PHASE_A: C1.1 J4.1 Q1.1 Q1.2 Q1.3 Q2.5 Q2.6 Q2.7 Q2.8 U1.18 | length 32.2
  L1 - Primary w0.254: v1(44.3,16.05) C1.1 45.8,16.05 47.125,17.375 U1.18
  L4 - Secondary w0.254: v1(26,35.3) 26,34.35 v1(44.3,16.05)
  other v1: 25.9,36.6 24.1,37.8 25.9,37.8 24.1,39 25.9,39 27.7,39 24.1,40.2 25.9,40.2 27.7,40.2 29.5,40.2 31.05,40.2 32.6,40.2 29.5,41.4 31.05,41.4 32.6,41.4 29.5,42.6 31.05,42.6 32.6,42.6 29.5,43.8 31.05,43.8 32.6,43.8 29.5,45 31.05,45 32.6,45 24.1,46.2 25.9,46.2 27.7,46.2 29.5,46.2 31.05,46.2 32.6,46.2 24.1,47.4 25.9,47.4 27.7,47.4 29.5,47.4 31.05,47.4 32.6,47.4
PHASE_A_H_PWM: J7.10 TP12.1 U1.1 | length 40.9
  L1 - Primary w0.15: U1.1 55.05,15.925 55.575,15.925 61.1,10.4 80.8,10.4 81.8,9.4 TP12.1 84.05,9.4 88.65,9.4 J7.10
PHASE_A_L_PWM: J7.3 TP13.1 U1.4 | length 35
  L1 - Primary w0.15: U1.4 57.875,18.025 59,16.9 81.4,16.9 83,18.5 J7.3
PHASE_B: C2.1 J5.1 Q3.1 Q3.2 Q3.3 Q4.5 Q4.6 Q4.7 Q4.8 U1.15 | length 34.7
  L1 - Primary w0.254: v1(44.3,19.05) C2.1 46.024,19.324 49.099,19.324 U1.15
  L4 - Secondary w0.254: v1(44.3,19.05) 44.3,19.8 38.2,25.9 38.2,38 40.4,40.2 v1(45.6,40.2)
  other v1: 47.5,35.3 47.4,36.6 45.6,37.8 47.4,37.8 45.6,39 47.4,39 49.2,39 47.4,40.2 49.2,40.2 51,40.2 52.55,40.2 54.1,40.2 51,41.4 52.55,41.4 54.1,41.4 51,42.6 52.55,42.6 54.1,42.6 51,43.8 52.55,43.8 54.1,43.8 51,45 52.55,45 54.1,45 45.6,46.2 47.4,46.2 49.2,46.2 51,46.2 52.55,46.2 54.1,46.2 45.6,47.4 47.4,47.4 49.2,47.4 51,47.4 52.55,47.4 54.1,47.4
PHASE_B_H_PWM: J7.5 TP14.1 U1.2 | length 35.7
  L1 - Primary w0.15: U1.2 56.175,16.725 60.5,12.4 TP14.1 83.1,12.45 88.7,12.45 J7.5
PHASE_B_L_PWM: J7.6 TP15.1 U1.5 | length 39.7
  L1 - Primary w0.15: U1.5 54.95,18.625 56.475,18.625 56.6,18.5 58.3,18.5 58.6,18.2 63.6,18.2 65.7,20.3 81.85,20.3 84.55,23 90.25,23 J7.6
PHASE_C: C3.1 J6.1 Q5.1 Q5.2 Q5.3 Q6.5 Q6.6 Q6.7 Q6.8 U1.12 | length 55.6
  L1 - Primary w0.254: v1(44.3,21.8) 44.353,21.8 44.603,22.05 C3.1 45.8,22.05 46.575,21.275 U1.12
  L4 - Secondary w0.254: v1(44.3,21.8) 44.3,22.8 39.9,27.2 39.9,37.3 40.7,38.1 42.5,38.1 44.9,35.7 44.9,34.3 46.5,32.7 55.3,32.7 61.6,39 v1@67,39
  other v1: 69,35.3 68.9,36.6 67.1,37.8 68.9,37.8 67.1,39 68.9,39 70.7,39 67.1,40.2 68.9,40.2 70.7,40.2 72.5,40.2 74.3,40.2 76.1,40.2 72.5,41.4 74.3,41.4 76.1,41.4 72.5,42.6 74.3,42.6 76.1,42.6 72.5,43.8 74.3,43.8 76.1,43.8 72.5,45 74.3,45 76.1,45 67.1,46.2 68.9,46.2 70.7,46.2 72.5,46.2 74.3,46.2 76.1,46.2 67.1,47.4 68.9,47.4 70.7,47.4 72.5,47.4 74.3,47.4 76.1,47.4
PHASE_C_H_PWM: J7.8 TP16.1 U1.3 | length 39
  L1 - Primary w0.15: U1.3 57.125,17.375 59.1,15.4 84.05,15.4 85.5,15.4 87.1,17 90.25,17 J7.8
PHASE_C_L_PWM: J7.1 TP17.1 U1.6 | length 36.3
  L1 - Primary w0.15: U1.6 56.525,19.325 56.85,19 62.8,19 65.1,21.3 79.85,21.3 TP17.1 J7.1
pads on no net: J7.MH1 J7.MH2 J9.MH1 J9.MH2 MH1.0 MH2.0 MH3.0 MH4.0

## Polygon pours and split planes (outlines as drawn)
GND on L1 - Primary "GND_L01_P034" (solid, pour order 34): 5.2,41 5.2,44 10.8,44 10.8,41
12V on L1 - Primary "12V_L01_P019" (solid, pour order 19): 15.75,14.25 15.75,18.2 6.2,18.2 4.8,19.6 4.8,58.3 8.7,62.2 8.7,63.4 0.6,63.4 0.6,14.25
36V on L1 - Primary "36V_L01_P000" (solid, pour order 0): 6.8,18.7 5.3,20.2 5.3,31 13.25,31 14.75,32.5 28.5,32.5 28.5,38.75 37,38.75 37,32.5 50,32.5 50,38.75 58.5,38.75 58.5,32.5 71.5,32.5 71.5,38.75 82,38.75 82,25 79.5,22.5 43.25,22.5 39.45,18.7
GND on L1 - Primary "GND_L01_P033" (solid, pour order 33): 66.1,46.15 61.75,50.5 55.25,50.5 55.25,42.3 66.1,42.3
PHASE_C on L1 - Primary "PHASE_C_L01_P002" (solid, pour order 2): 66.5,46.75 56.75,56.5 56.75,70.5 73.5,70.5 73.5,63.75 76.75,60.5 76.75,39 71.25,39 71.25,34.75 69,34.75 66.5,37.25
PHASE_A on L1 - Primary "PHASE_A_L01_P003" (solid, pour order 3): 33.25,50.5 34.25,51.5 34.25,70.5 20.5,70.5 20.5,52.25 23.5,49.25 23.5,37.25 26,34.75 28.25,34.75 28.25,39 33.25,39
GND on L1 - Primary "GND_L01_P017" (solid, pour order 17): 15,69 14.25,69 14.25,69.667 15,69.667 15,70 19,70 19,64.75 17.25,64.75 17.25,65.75 15,65.75
GND on L1 - Primary "GND_L01_P013" (solid, pour order 13): 15,50 16.3,50 16.3,48.4 22.4,48.4 22.4,49.8 20,52.2 20,54.9 13.75,54.9 13.75,50
GND on L1 - Primary "GND_L01_P027" (solid, pour order 27): 44.6,47.75 41.85,50.5 33.75,50.5 33.75,42.3 44.6,42.3
5V on L1 - Primary "5V_L01_P020" (solid, pour order 20): 26.176,16.739 26.176,12.739 25.426,11.989 22.926,11.989 22.926,9.489 26.176,9.489 26.176,7.489 32.926,7.489 32.926,10.489 30.926,10.489 30.926,13.739 29.926,13.739 29.926,16.739
3V3 on L1 - Primary "3V3_L01_P016" (solid, pour order 16): 9.75,71.5 9.75,67.5 9,66.75 6.5,66.75 6.5,64.25 9.75,64.25 9.75,61.25 16.5,61.25 16.5,65.25 14.5,65.25 14.5,68.5 13.5,68.5 13.5,71.5
NetQ2_1 on L1 - Primary "NETQ2_1_L01_P004" (solid, pour order 4): 23.25,46 19.5,46 18,44.5 16.4,44.5 16.4,41.25 20.55,41.25 21.55,42.25 23.25,42.25
GND on L1 - Primary "GND_L01_P021" (solid, pour order 21): 21.452,9.239 17.452,9.239 17.452,17.989 20.202,17.989 20.202,11.739 21.452,11.739
GND on L1 - Primary "GND_L01_P018" (solid, pour order 18): 5,64 1,64 1,72.75 3.75,72.75 3.75,66.5 5,66.5
GND on L1 - Primary "GND_L01_P011" (solid, pour order 11): 73.9,79 87.5,79 87.5,71.6 82.9,71.6 82.9,68.3 81.5,68.3 81.5,71.5 81.4,71.6 73.9,71.6
GND on L1 - Primary "GND_L01_P026" (solid, pour order 26): 49,11.5 49,14.5 55,14.5 55,11.5
GND on L1 - Primary "GND_L01_P025" (solid, pour order 25): 78.75,51 81.75,51 81.75,45 78.75,45
GND on L1 - Primary "GND_L01_P023" (solid, pour order 23): 31.452,14.1 32.5,14.1 32.5,15.439 35.452,15.439 35.452,10.4 33.952,10.4 33.952,11.189 31.452,11.189
PHASE_B on L1 - Primary "PHASE_B_L01_P001" (solid, pour order 1): 45,50 38.75,56.25 38.75,70.5 54.75,70.5 54.75,39 49.75,39 49.75,34.75 47.5,34.75 45,37.25
PHASE_C on L4 - Secondary "PHASE_C_L04_P032" (solid, pour order 32): 73.5,63.75 73.5,70.5 56.75,70.5 56.75,56.5 64.625,48.625 64.625,42.625 66.5,40.75 66.5,37.25 69,34.75 72.25,34.75 76.75,39.25 76.75,60.5
PHASE_B on L4 - Secondary "PHASE_B_L04_P031" (solid, pour order 31): 43.125,42.625 43.125,47.125 41.25,49 41.25,70.5 54.5,70.5 54.5,37.5 51.75,34.75 47.5,34.75 45,37.25 45,40.75
PHASE_A on L4 - Secondary "PHASE_A_L04_P030" (solid, pour order 30): 23.5,40.75 23,41.25 23,49.75 20.5,52.25 20.5,70.5 34.25,70.5 34.25,51.5 33.25,50.5 33.25,37.25 30.75,34.75 26,34.75 23.5,37.25
GND on L2 - GND "GND_L02_P008" (solid, pour order 8): 0,-10 0,79.5 99.5,79.5 99.5,-10
GND on L3 - GND "GND_L03_P009" (solid, pour order 9): 0,-10 0,79.5 99.5,79.5 99.5,-10

## Silkscreen, mask and mechanical layers (free items; w line width, h text height)
Top Overlay:
  lines w0.254: 76.675,61.6 76.675,61.1 81.675,61.1 81.675,61.6 ; 79.175,60.1 79.175,61.1
  text "3.3V" at 14.232,73.549 h2
  text "Hall Sensor" at 85.269,67.841 h2 r180
  text "C" at 76.251,62.02 h1.5
  text "B" at 78.812,62.02 h1.5
  text "A" at 81.226,62.02 h1.5
  text "Hall Sense" at 76.013,58.72 h1.5
  text "Phase A" at 32.424,57.445 h3 r180
  text "Phase B" at 50.476,57.445 h3 r180
  text "Phase C" at 68.693,57.461 h3 r180
  text "12V" at 5.248,56.149 h2
  text "CS_A" at 7.226,49.945 h1.5
  text "GND" at 78.638,43.35 h1.5
  text "GND" at 10.549,41.851 h1.5
  text "GND" at 35.388,41.101 h1.5
  text "GND" at 56.888,41.101 h1.5
  text "GLB" at 33.074,39.845 h1.5
  text "GLC" at 54.528,39.845 h1.5
  text "GLA" at 17.193,36.52 h1.5
  text "Motor Power" at 1.155,36.029 h3 r270
  text "GHB" at 38.963,35.442 h1.5
  text "GHC" at 60.417,35.442 h1.5
  text "GHA" at 17.082,34.77 h1.5
  text "Analog Output" at 98.595,34.176 h3 r90
  text "–" at 3.374,33.094 h4 r270
  text "36V" at 78.424,31.399 h2
  text "+" at 3.039,25.744 h4 r270
  text "C LOW PWM" at 73.756,24.02 h1.5
  text "B LOW PWM" at 73.809,21.02 h1.5
  text "12V Power" at 1.151,19.6 h3 r270
  text "A LOW PWM" at 73.759,18.02 h1.5
  text "+" at 4.539,17.344 h4 r270
  text "C HIGH PWM" at 73.459,14.92 h1.5
  text "5V" at 33.866,14.858 h2
  text "PWM Input" at 98.594,11.974 h3 r90
  text "B HIGH PWM" at 73.512,11.92 h1.5
  text "–" at 4.874,10.494 h4 r270
  text "GND" at 50.388,10.1 h1.5
  text "A HIGH PWM" at 73.462,8.92 h1.5
Mechanical 1:
  the board outline again, w0.254